# Altium PCB Micro2440.PcbDoc (part 2 of 2)
Units mil, origin at the board's own origin, x right, y up, seen from the top; angles counter-clockwise.
Board outline 3914 x 3499.3 mil, 2 copper layers (Top Layer, Bottom Layer); 61 components, 196 nets, 504 pads, 76 vias.
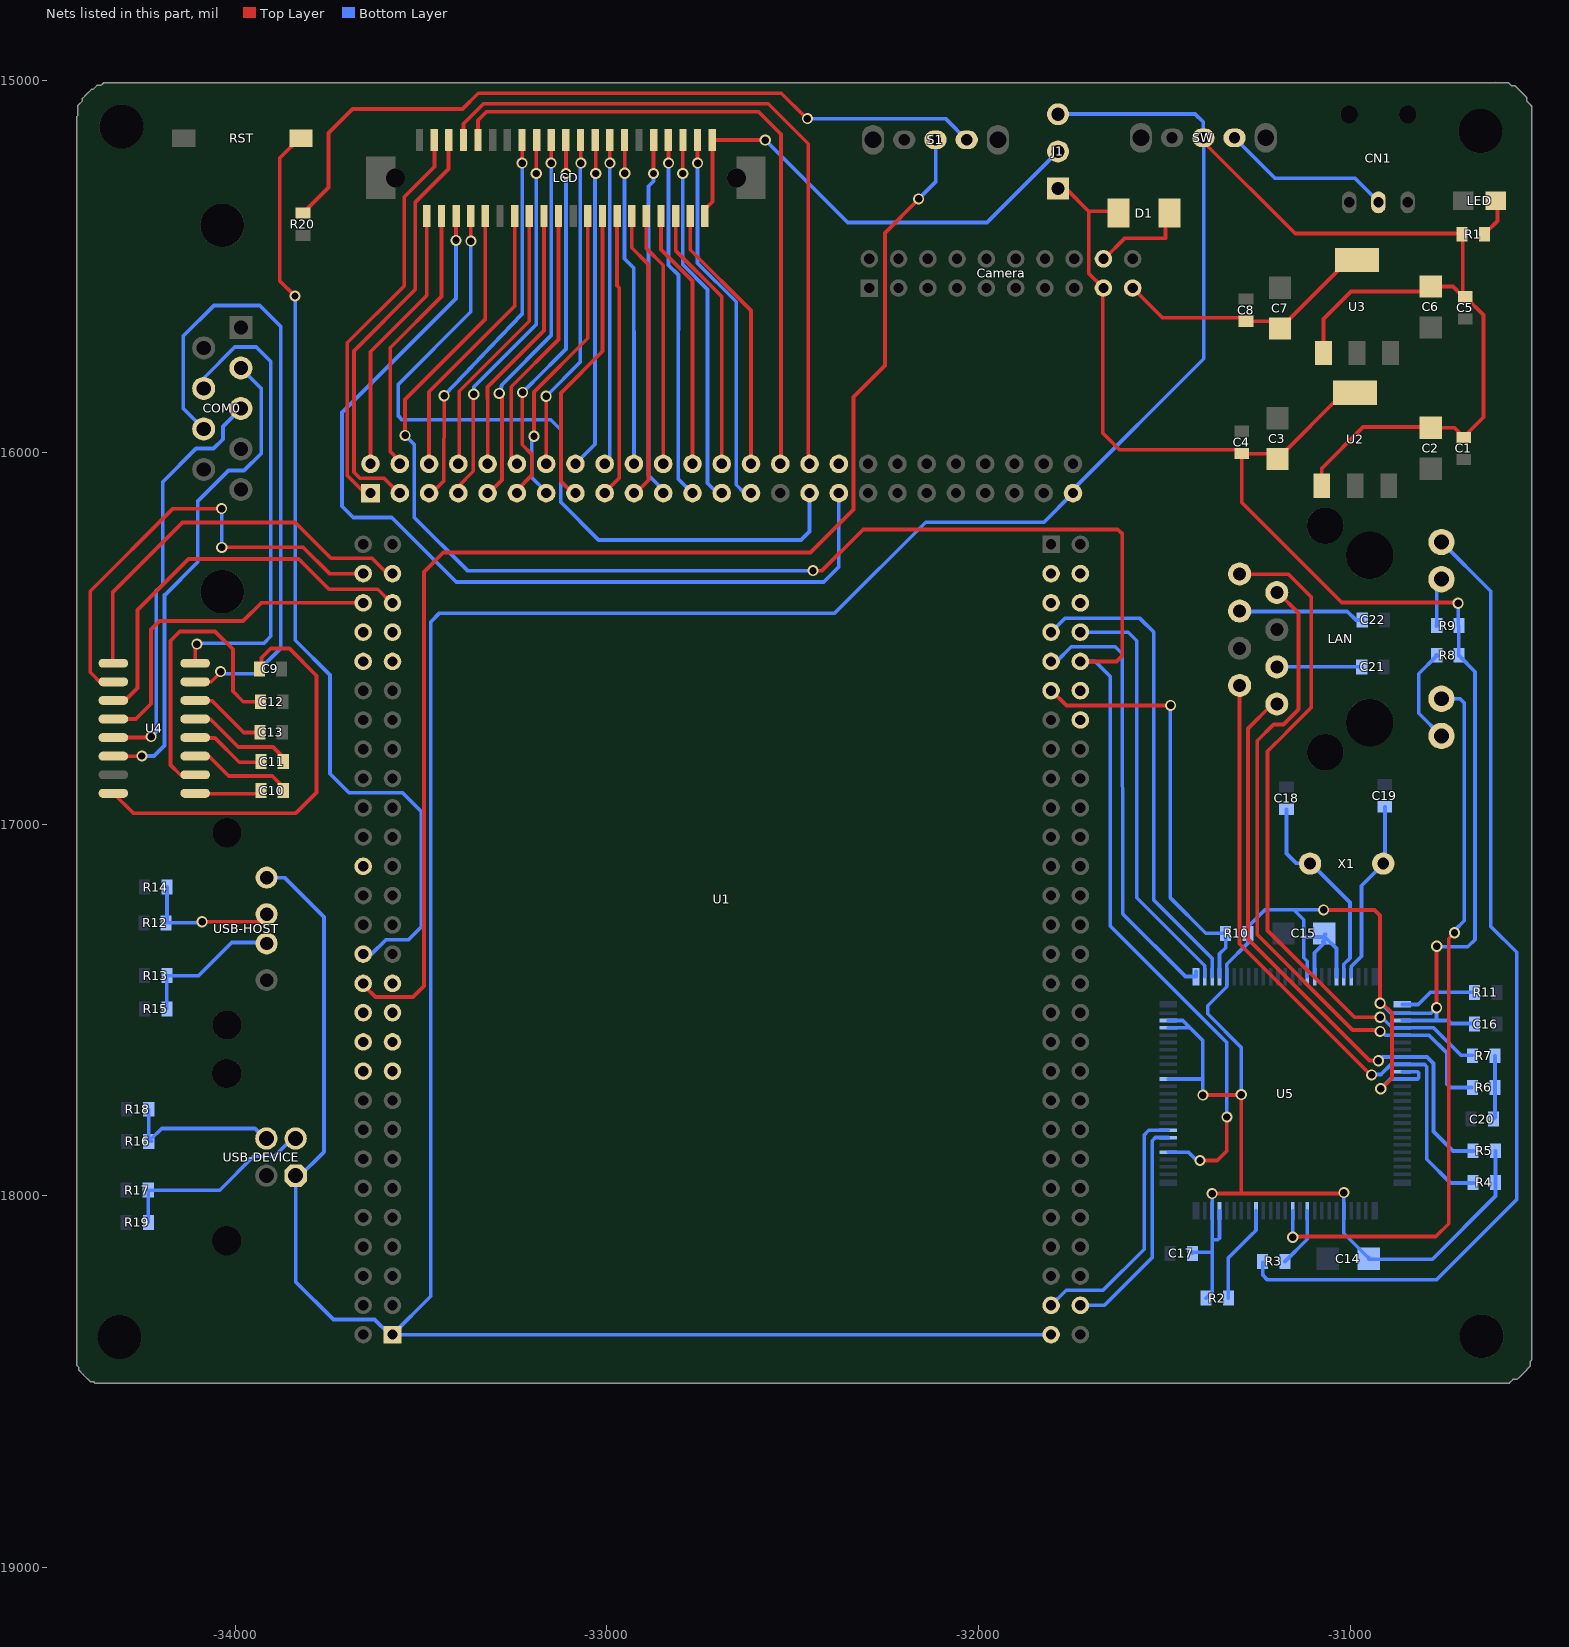
[diagram p2: the nets of this part, all layers, seen from the top]

## Via types
v1: diameter 30, hole 20, Top Layer to Bottom Layer, 75 vias
v2: diameter 30, hole 20, Top Layer to Bottom Layer, tented top, 1 vias

## Nets (pads, with @x,y where several pads share a name; then routed paths per layer and width w, separated by ;. In a path a pad name is that pad's centre, name@x,y a point inside that pad or via, vN(x,y) a via of type N, cw(c..) or ccw(c..) an arc to the next point about the centre after c; other vN are vias at no path point) (continued)
LDATA14: U1.PC53 U5.83 | length 690.5
  Bottom Layer w10: U1.PC53@-31805.13,-18294.87 -31764.51,-18254.24 -31665.07,-18254.24 -31554.69,-18143.85 -31554.69,-17836.42 -31542.12,-17823.86 U5.83@-31489.87,-17823.86
LDATA15: U1.PC54 U5.82 | length 607.4
  Bottom Layer w10: U1.PC54@-31726.39,-18294.87 -31661.68,-18294.87 -31533.08,-18166.26 -31533.08,-17852.21 -31524.41,-17843.54 U5.82@-31489.87,-17843.54
LEND: U1.PB34
LNGCS1: U1.PC3
LNGCS2: U1.PC5
LNGCS3: U1.PC4
LNGCS4: U1.PC7 U5.3 | length 1298.6
  Bottom Layer w10: U1.PC7@-31805.13,-16483.84 -31768.11,-16446.82 -31566.03,-16446.82 -31529.07,-16483.77 -31529.07,-16493.32 -31529.12,-17168.46 -31529.12,-17204.69 -31371.76,-17362.05 U5.3@-31371.76,-17410.47
LNOE: U1.PC9 U5.1 | length 1196.2
  Bottom Layer w10: U1.PC9@-31805.13,-16562.58 -31790.16,-16562.58 -31750.81,-16523.24 -31632.2,-16523.24 -31613.44,-16542 -31613.44,-16560.89 -31612.32,-17241.7 -31443.55,-17410.47 U5.1@-31415.06,-17410.47 U5.1@-31415.06,-17396.94
LNWBE1: U1.PC6
LNWE: U1.PC8 U5.2 | length 1140.9
  Bottom Layer w10: U1.PC8@-31726.39,-16483.84 -31597.49,-16483.84 -31574.45,-16506.88 -31574.45,-16509.06 -31574.38,-17182.39 -31574.38,-17198.34 -31391.44,-17381.28 U5.2@-31391.44,-17410.47
M_NRESET: RST.1 U1.PA28 | length 2589.4
  Top Layer w10: v1(-33839.13,-15579.5) -33880.4,-15538.23 -33880.4,-15208.79 -33823.2,-15151.59 RST.1@-33823.2,-15160.13
  Bottom Layer w10: v1@-33838.78,-15575.77 -33838.23,-15576.31 -33838.23,-16505.61 -33744.71,-16599.13 -33744.71,-16864.7 -33693.73,-16915.68 -33549.97,-16915.68 -33499.52,-16966.13 -33499.52,-17277 -33533.59,-17311.07 -33594.28,-17311.07 -33633.19,-17349.98 U1.PA28@-33655.53,-17349.98
NCTS0: U1.PA53 U4.9 | length 1085.4
  Top Layer w10: U4.9@-34327.69,-16567.44 -34329,-16566.13 -34329,-16376 -34141.97,-16188.97 -33838.12,-16188.97 -33741.85,-16285.24 -33632.17,-16285.24 -33591.04,-16326.36 U1.PA53@-33576.79,-16326.36 U1.PA53@-33576.79,-16319.49
NETACT: LAN.10 U5.62 | length 1991.1
  Top Layer w10: v1@-31156.35,-18109.93 -30769.96,-18109.93 -30735.34,-18075.31 -30735.34,-17308.52 v1@-30719.9,-17293.08
  Bottom Layer w10: U5.62@-31155.22,-18040.39 -31155.22,-18111.48 v1(-31155.03,-18111.67) ; LAN.10@-30754.84,-16663.02 -30704.77,-16663.02 -30693.48,-16674.31 -30693.48,-17260.36 -30718.16,-17285.04 v1@-30718.16,-17293.79
  other v1: -30719.81,-17292.55
NetC10_1: C10.1 U4.3 | length 290.7
  Top Layer w10: U4.3@-34123.69,-16818.44 -34107.69,-16818.44 -34069.56,-16818.44 -34017,-16871 -33900,-16871 C10.1@-33868,-16903
NetC10_2: C10.2 U4.1 | length 193.1
  Top Layer w10: U4.1@-34123.69,-16918.44 -34107.69,-16918.44 -33935.44,-16918.44 C10.2@-33932,-16915
NetC11_1: C11.1 U4.5 | length 294.8
  Top Layer w10: U4.5@-34123.69,-16718.44 -34107.69,-16718.44 -34066.56,-16718.44 -33992,-16793 -33898,-16793 C11.1@-33871,-16820
NetC11_2: C11.2 U4.4 | length 218.8
  Top Layer w10: U4.4@-34123.69,-16768.44 -34107.69,-16768.44 -34054.56,-16768.44 -33989,-16834 C11.2@-33932,-16834
NetC12_2: C12.2 U4.2 | length 808.6
  Top Layer w10: U4.2@-34107.69,-16867.44 -34147.56,-16867.44 -34174,-16841 -34174,-16507 -34149,-16482 -34054,-16482 -34006,-16530 -34006,-16643 -33978,-16671 ; -33978.21,-16671.21 C12.2@-33931.74,-16671.21
NetC13_2: C13.2 U4.6 | length 225.1
  Top Layer w10: U4.6@-34123.69,-16668.44 -34107.69,-16668.44 -34062.56,-16668.44 -33977,-16754 C13.2@-33934,-16754
NetC18_1: C18.1 U5.21 X1.1 | length 550.6
  Bottom Layer w10: C18.1@-31171.58,-16960.26 -31171.58,-17079.57 -31145.94,-17105.21 -31106.79,-17105.21 -31000.78,-17211.22 -31000.78,-17360.81 -31017.46,-17377.49 U5.21@-31017.46,-17410.29
NetC19_1: C19.1 U5.22 X1.2 | length 494.8
  Bottom Layer w10: U5.22@-30997.74,-17410.47 -30997.74,-17383.23 -30970.22,-17355.71 -30970.22,-17166.22 -30906.79,-17102.79 -30906.79,-16954.28 C19.1@-30907.42,-16953.65
NetC20_1: C20.1 R6.1 R7.1 | length 169.8
  Bottom Layer w10: C20.1@-30613.78,-17792.09 -30611.01,-17789.33 R6.1@-30611.01,-17708.68 R7.1@-30611.01,-17623.48
NetC21_1: C21.1 LAN.3 | length 229.9
  Bottom Layer w10: LAN.3@-31197.76,-16577.2 -30968.43,-16577.2 C21.1@-30968.03,-16577.59
NetC22_1: C22.1 LAN.6 | length 340.3
  Bottom Layer w10: LAN.6@-31298,-16428 -31008,-16428 -30984.6,-16451.4 C22.1@-30967.38,-16451.4
NetCN1_2: CN1.2 SW.2 | length 480.8
  Top Layer w10: CN1.2@-30936.09,-15343.93 -30924.48,-15332.33 CN1.2@-30924.48,-15327.53
  Bottom Layer w10: SW.2@-31311.36,-15153.89 -31202.48,-15262.76 -30987.44,-15262.76 CN1.2@-30923.37,-15326.83
NetLAN_9: LAN.9 R8.1 | length 262
  Bottom Layer w10: R8.1@-30769.24,-16546.76 R8.1@-30768,-16545.53 ; R8.1@-30768,-16548 -30816,-16596 -30816,-16701.87 LAN.9@-30754.84,-16763.02
NetLAN_11: LAN.11 R9.1 | length 132.9
  Bottom Layer w10: R9.1@-30768,-16468 -30766.74,-16466.74 -30767.67,-16465.8 -30767.67,-16354.2 LAN.11@-30754.84,-16341.37
NetLED_1: LED.1 R1.1 | length 96.1
  Top Layer w10: R1.1@-30639.47,-15413.42 -30604,-15377.95 LED.1@-30604,-15332
NETLINK: LAN.12 R3.1 | length 2670
  Bottom Layer w10: R3.1@-31235.61,-18179.73 -31235.92,-18180.05 -31235.92,-18212.18 -31235.22,-18212.89 ; -31234.93,-18213.95 -31222.52,-18226.36 -30768.79,-18226.36 -30588.89,-18046.46 ; LAN.12@-30756,-16242 LAN.12@-30755.74,-16242.26 ; LAN.12@-30756,-16240 -30621.96,-16374.04 -30621.96,-17275.58 -30552.46,-17345.08 -30552.46,-17365.13 ; -30589.49,-18047 -30552.36,-18009.88 -30552.36,-17361.5
NetR2_1: R2.1 U5.67 | length 266.5
  Bottom Layer w10: R2.1@-31328.1,-18275.59 -31328.1,-18166.74 -31263.46,-18102.1 -31262.73,-18102.1 -31253.65,-18093.01 U5.67@-31253.65,-18040.39
NetR3_2: R3.2 U5.60 | length 168.1
  Bottom Layer w10: R3.2@-31175.92,-18176.81 -31115.89,-18116.77 -31115.89,-18094.17 ; -31115.86,-18101.46 U5.60@-31115.86,-18040.9
NetR11_2: R11.2 U5.26 | length 210.7
  Bottom Layer w10: U5.26@-30859.94,-17485.28 -30817.04,-17485.28 -30784.62,-17452.85 R11.2@-30662.67,-17452.85
NetR12_1: R12.1 R14.1 USB-HOST.2 | length 374.4
  Top Layer w10: v1(-34088.87,-17262.79) -33936.07,-17262.79 USB-HOST.2@-33917.08,-17243.79
  Bottom Layer w10: R12.1@-34185.63,-17265.97 -34093.5,-17265.97 v1@-34088.88,-17261.34 ; R14.1@-34183.47,-17169.58 -34183.47,-17263.53 R12.1@-34182,-17265
NetR13_1: R13.1 R15.1 USB-HOST.3 | length 398.9
  Bottom Layer w10: R15.1@-34183.69,-17497.31 -34183.69,-17411.83 -34185.55,-17409.97 R13.1@-34183.52,-17407.94 ; R13.1@-34183.69,-17407.94 R13.1@-34183.52,-17407.94 ; R13.1@-34182.63,-17407.05 R13.1@-34183.52,-17407.94 ; USB-HOST.3@-33914.07,-17318.51 -34009.43,-17318.51 -34098.87,-17407.94 R13.1@-34183.52,-17407.94
NetR16_2: R16.2 R18.2 USB-DEVICE.3 | length 450.1
  Bottom Layer w10: R18.2@-34232.54,-17767.36 -34232.54,-17845.46 R16.2@-34228.39,-17849.61 ; USB-DEVICE.3@-33924.76,-17853.76 -33916.55,-17845.55 USB-DEVICE.3@-33916,-17845 ; USB-DEVICE.3@-33919,-17847 -33947,-17819 -34197.78,-17819 R16.2@-34228.39,-17849.61 ; R16.2@-34228.39,-17849.61 R16.2@-34232.54,-17853.76 -34224.24,-17853.76 R16.2@-34228.39,-17849.61
NetR17_2: R17.2 R19.1 USB-DEVICE.2 | length 533.2
  Bottom Layer w10: R19.1@-34233.95,-18070.42 -34233.63,-18070.1 R17.2@-34233.63,-17985.03 -34041.53,-17985.03 -33950.5,-17894 -33894,-17894 -33845,-17845 USB-DEVICE.2@-33844,-17845
NetR20_1: R20.1 S1.4 | length 2055.5
  Top Layer w10: R20.1@-33817.71,-15356.6 -33748.91,-15287.8 -33748.91,-15141.34 -33684.03,-15076.46 -33388.48,-15076.46 -33345.83,-15033.81 -32530.76,-15033.81 v1@-32464.46,-15100.12
  Bottom Layer w10: v1(-32460.54,-15102.37) -32089.07,-15102.37 S1.4@-32029.82,-15161.61
NRESET: LCD.10 U1.PC10 U5.80 | length 5061.1
  Top Layer w10: v1(-33542.84,-15954.71) -33543.31,-15857.81 -33326.87,-15641.37 LCD.10@-33326.87,-15364.16 ; v1(-32445.51,-16318.33) -32421.42,-16318.33 -32310.52,-16207.42 -31625.47,-16207.42 -31613.26,-16219.62 -31613.26,-16546.57 -31629.27,-16562.58 U1.PC10@-31726.39,-16562.58 U1.PC10@-31726.39,-16569.6 ; v2(-31404.42,-17905.16) -31357.96,-17905.16 -31332.24,-17879.44 v1(-31332.24,-17788.1)
  Bottom Layer w10: v1(-33542.84,-15954.71) -33518.28,-15979.26 -33518.28,-16175.26 -33375.22,-16318.33 v1(-32445.51,-16318.33) ; U1.PC10@-31726.39,-16562.58 -31686.15,-16562.58 -31646.21,-16602.52 -31646.21,-17273.63 -31332.24,-17587.6 v1(-31332.24,-17788.1) ; U5.80@-31489.87,-17882.91 -31435.12,-17882.91 -31412.88,-17905.16 v2(-31404.42,-17905.16)
NRTS0: U1.PA54 U4.10 | length 1226.9
  Top Layer w10: U4.10@-34358,-16624 -34390,-16592 -34390,-16374 -34168.23,-16152.23 v1@-34037.23,-16152.23 ; v1(-34036.21,-16255.78) -33817.15,-16255.78 -33746.56,-16326.36 U1.PA54@-33655.53,-16326.36
  Bottom Layer w10: v1(-34036.21,-16255.78) v1@-34036.21,-16151.65 ; U1.PA54@-33655.53,-16326.36 U1.PA54@-33650.52,-16326.36
  other v1: -34036.43,-16151.43
NWAIT: R10.2 U1.PC11 U5.4 | length 1167.5
  Top Layer w10: U1.PC11@-31805.13,-16641.32 -31803.66,-16641.32 -31763.92,-16681.06 v1(-31483.46,-16681.06)
  Bottom Layer w10: v1(-31483.46,-16681.06) -31484.13,-16681.73 -31484.13,-17198.71 -31388.76,-17294.08 R10.2@-31335.37,-17294.08 -31335.37,-17332.56 -31351.71,-17348.91 -31351.71,-17373.43 ; U5.4@-31352.07,-17410.47 U5.4@-31352.07,-17410 ; U5.4@-31352,-17410 -31352,-17373.43
NXDACK0: U1.PC12
NXDREQ0: U1.PC14
OM0: S1.3 U1.PA26 | length 3631.4
  Top Layer w10: U1.PA26@-33649.86,-17428.72 -33649.86,-17438.42 -33622.84,-17465.44 -33521.57,-17465.44 -33492.11,-17435.98 -33492.11,-16321.8 -33440.13,-16269.82 -32452.44,-16269.82 -32336.76,-16154.14 -32336.76,-15851.12 -32252,-15766.36 -32252,-15664.07 ; -32251.95,-15664.02 -32251.95,-15409.98 v1@-32160.9,-15318.92
  Bottom Layer w10: U1.PA26@-33655.53,-17428.72 U1.PA26@-33640.24,-17428.72 ; v1(-32161.49,-15318.32) -32114.98,-15271.81 S1.3@-32114.98,-15159.29
RSCTS0: COM0.7 U4.8 | length 1246
  Top Layer w10: U4.8@-34107.69,-16567.44 -34107.69,-16529.69 v1@-34106,-16528
  Bottom Layer w10: v1@-34104,-16514 -33922.87,-16514 -33904,-16495.13 -33904,-15756 -33943,-15717 -34001,-15717 -34084.63,-15800.63 COM0.7@-34084.63,-15828.16
  other v1: -34103,-16516
RSRTS0: COM0.8 U4.7 | length 1769.6
  Top Layer w10: U4.7@-34123.69,-16618.44 U4.7@-34082.44,-16618.44 ; U4.7@-34107.69,-16617.44 -34064.44,-16617.44 v1@-34039,-16592
  Bottom Layer w10: COM0.8@-34084.63,-15937.16 -34140,-15881.79 -34140,-15688 -34057,-15605 -33934,-15605 -33877,-15662 -33877,-16526.11 -33946.89,-16596 v1@-34040,-16596
  other v1: -34039,-16590
RSRXD0: COM0.3 U4.13 | length 1108.4
  Top Layer w10: U4.13@-34327.69,-16767.44 -34229.44,-16767.44 v1@-34229,-16767
  Bottom Layer w10: v1(-34226,-16765) -34212,-16751 -34212,-16371 ; -34210,-16371 -34195,-16356 -34195,-16080 -34105,-15990 -34058,-15990 -34033,-15965 -34033,-15930.53 COM0.3@-33984.63,-15882.16
RSTXD0: COM0.2 U4.14 | length 1306.4
  Top Layer w10: U4.14@-34327.69,-16817.44 -34266.56,-16817.44 -34266,-16818
  Bottom Layer w10: v1(-34251,-16817) -34218,-16817 -34190,-16789 -34190,-16388 ; -34190,-16384 -34189,-16384 -34101,-16296 -34101,-16132 -34018,-16049 -33976,-16049 -33930,-16003 -33930,-15828 -33984.73,-15773.27 COM0.2@-33988,-15770
RX+: LAN.8 R7.2 U5.29 | length 1854.3
  Top Layer w10: LAN.8@-31298,-16328 -31166,-16328 -31105.01,-16388.99 -31105.01,-16686.46 -31172.47,-16753.92 ; -31172.67,-16754.29 -31222.56,-16804.19 -31222.56,-17286.46 -30989.03,-17520 v1(-30920,-17520)
  Bottom Layer w10: v1(-30920,-17520) -30915.45,-17520 -30887.19,-17548.27 U5.29@-30859.94,-17548.27 ; U5.29@-30859.94,-17548 -30775.94,-17548 -30701.53,-17622.41 R7.2@-30671.47,-17622.41
RX-: LAN.7 R6.2 U5.30 | length 1802
  Top Layer w10: LAN.7@-31194,-16378 -31139.62,-16432.38 -31139.62,-16691.62 -31180,-16732 -31206.36,-16732 -31250.36,-16776 -31250.36,-17297.44 -30993.8,-17554 v1@-30920,-17554
  Bottom Layer w10: v1@-30922,-17554 -30920,-17554 -30906,-17568 -30788,-17568 -30740.15,-17615.85 -30740.15,-17699.85 -30731.05,-17708.95 R6.2@-30673.25,-17708.95
  other v1: -30920,-17558
RXD0: U1.PA52 U4.12 | length 918.8
  Top Layer w10: U4.12@-34327.69,-16717.44 -34267.3,-16717.44 -34226.57,-16676.71 -34226.57,-16476.61 -34203.83,-16453.87 -33978.71,-16453.87 -33929.94,-16405.1 U1.PA52@-33655.53,-16405.1
RXD1: U1.PA50
RXD2: U1.PA48 | length 19
  Bottom Layer w10: U1.PA48@-33674.55,-16562.58 U1.PA48@-33655.53,-16562.58
SDCLK: U1.PA20
SDCMD: U1.PA21
SDDATA0: U1.PA24
SDDATA1: U1.PA25
SDDATA2: U1.PA22
SDDATA3: U1.PA23
TSXM: LCD.5 U1.PB3 | length 1145.9
  Top Layer w10: U1.PB3@-33557.1,-16109.83 -33557.1,-16109.1 -33560.33,-16109.1 -33599.67,-16069.76 -33664.23,-16069.76 -33680.31,-16053.69 -33680.31,-15727.43 -33515.86,-15562.97 -33515.86,-15327.86 -33426,-15238 LCD.5@-33426,-15160
TSXP: LCD.4 U1.PB4 | length 734.4
  Top Layer w10: U1.PB4@-33557.1,-16031.09 -33557.1,-16023.32 -33582.53,-15997.89 -33582.53,-15718.77 -33444.98,-15581.23 LCD.4@-33444.98,-15364.16
TSYM: LCD.3 U1.PB1 | length 1081.7
  Top Layer w10: U1.PB1@-33635.84,-16109.83 -33651.11,-16109.83 -33698.31,-16062.62 -33698.31,-15705.19 -33545.4,-15552.28 -33545.4,-15313.29 -33464,-15231.9 LCD.3@-33464,-15160
TSYP: LCD.2 U1.PB2 | length 729.7
  Top Layer w10: U1.PB2@-33635.84,-16031.09 -33635.84,-15729.31 -33484.35,-15577.82 LCD.2@-33484.35,-15364.16
TX+: LAN.1 R5.1 U5.33 | length 1632.7
  Top Layer w10: LAN.1@-31198,-16678 -31210,-16678 -31275.24,-16743.24 -31275.24,-17309.31 -30948.54,-17636 v1@-30920,-17636
  Bottom Layer w10: v1(-30924.31,-17636.88) -30914.44,-17627.01 U5.33@-30859.94,-17627.01 -30793.39,-17627.01 -30776.15,-17644.25 -30776.15,-17827.28 -30723.76,-17879.67 R5.1@-30668.51,-17879.67
TX-: LAN.2 R4.1 U5.34 | length 1763.8
  Top Layer w10: LAN.2@-31298,-16630 -31298,-17322.23 -30949.1,-17671.13 -30938.87,-17671.13 v1@-30936,-17674
  Bottom Layer w10: v1@-30942.55,-17673.93 -30917.93,-17673.93 ; -30918,-17674 -30917.93,-17673.93 ; -30917.41,-17673.93 -30917.93,-17673.93 ; R4.1@-30668.57,-17965.88 -30730.16,-17965.88 -30794.17,-17901.87 -30794.17,-17653.07 -30800.55,-17646.69 U5.34@-30859.94,-17646.69 -30890.69,-17646.69 -30917.93,-17673.93
  other v1: -30942.77,-17675.03
TXD0: U1.PA51 U4.11 | length 1070.5
  Top Layer w10: U4.11@-34317,-16669 -34298,-16669 -34263,-16634 -34263,-16424 -34125.85,-16286.85 -33828.97,-16286.85 -33747.6,-16368.22 -33616.42,-16368.22 -33579.54,-16405.1 U1.PA51@-33576.79,-16405.1
TXD1: U1.PA49
TXD2: U1.PA47
VCC: C9.1 U4.16 | length 1114.5
  Top Layer w10: U4.16@-34327.69,-16917.44 -34274.45,-16970.68 -33836.68,-16970.68 -33781,-16915 -33781,-16600.92 -33853.92,-16528 -33904,-16528 -33929,-16553 C9.1@-33929,-16573
VCLK: LCD.6 U1.PB33 | length 2544.8
  Top Layer w10: v1(-33406,-15430) LCD.6@-33406,-15364
  Bottom Layer w10: v1(-33406,-15430) -33406,-15586 -33712.81,-15892.81 -33712.81,-16145.3 -33682.63,-16175.47 -33578.84,-16175.47 -33405.49,-16348.83 -32416.45,-16348.83 -32376,-16308.37 U1.PB33@-32376,-16109.83
VD0: LCD.39 U1.PB27 | length 1038
  Top Layer w10: v1(-32756,-15222) LCD.39@-32756.01,-15159.43 ; U1.PB27@-32630.1,-16109.83 U1.PB27@-32612.22,-16109.83
  Bottom Layer w10: v1(-32756,-15222) -32756,-15491.17 -32652.17,-15595 -32652.26,-15837.1 -32652.26,-16087.04 -32629.47,-16109.83 U1.PB27@-32612.22,-16109.83
VD1: LCD.38 U1.PB28 | length 734.6
  Top Layer w10: LCD.38@-32775.69,-15364.16 -32775.69,-15455.05 -32612.22,-15618.52 U1.PB28@-32612.22,-16031.09
VD2: LCD.37 U1.PB25 | length 1017
  Top Layer w10: v1(-32796,-15250) LCD.37@-32796,-15160 ; U1.PB25@-32708.05,-16109.83 U1.PB25@-32690.96,-16109.83
  Bottom Layer w10: v1(-32796,-15250) -32796,-15494.86 -32729.01,-15561.84 ; -32729.35,-15562.18 -32729.35,-16083.08 -32702.6,-16109.83 U1.PB25@-32690.96,-16109.83
VD3: LCD.36 U1.PB26 | length 717.1
  Top Layer w10: LCD.36@-32815.06,-15364.16 -32815.06,-15456.76 -32691.82,-15580 ; U1.PB26@-32690.96,-16031.09 -32690.96,-15580.86
VD4: LCD.35 U1.PB23 | length 999.7
  Top Layer w10: v1(-32834,-15222) LCD.35@-32834,-15158 ; U1.PB23@-32775.4,-16109.83 U1.PB23@-32769.7,-16109.83
  Bottom Layer w10: v1(-32834,-15222) -32834,-15496.63 -32807.53,-15523.1 -32807.83,-15820.54 ; -32807.84,-15835.96 -32807.83,-15820.57 ; U1.PB23@-32769.7,-16109.83 -32807.83,-16071.7 -32807.83,-15820.54
VD5: LCD.34 U1.PB24 | length 701.9
  Top Layer w10: LCD.34@-32854.43,-15364.16 -32854.43,-15454.2 -32769.57,-15539.07 ; U1.PB24@-32769.7,-16031.09 -32769.7,-15539.19
VD6: LCD.33 U1.PB21 | length 976.3
  Top Layer w10: v1(-32874.53,-15250) LCD.33@-32874.53,-15158
  Bottom Layer w10: v1(-32874.53,-15250) -32874.53,-15270.53 -32888.05,-15284.05 -32888.05,-16061.51 -32848.44,-16101.11 U1.PB21@-32848.44,-16109.83 U1.PB21@-32850.93,-16109.83
VD7: LCD.32 U1.PB22 | length 685.9
  Top Layer w10: LCD.32@-32893.8,-15364.16 -32893.8,-15451.41 -32848.27,-15496.94 -32848.44,-15497.11 U1.PB22@-32848.44,-16031.09
VD8: LCD.30 U1.PB19 | length 783.5
  Top Layer w10: LCD.30@-32933.17,-15364.16 -32933.17,-15449.47 -32893.35,-15489.29 -32887.94,-15494.7 -32887.94,-16075.38 -32922.39,-16109.83 U1.PB19@-32927.18,-16109.83
VD9: LCD.29 U1.PB20 | length 878.7
  Top Layer w10: v1(-32951.75,-15249.15) LCD.29@-32951.75,-15163.15
  Bottom Layer w10: v1(-32951.75,-15249.15) -32952.89,-15253.11 -32952.89,-15479.08 -32927.37,-15504.6 -32927.18,-15838.7 U1.PB20@-32927.18,-16031.09
VD10: LCD.28 U1.PB17 | length 764.5
  Top Layer w10: U1.PB17@-33005.92,-16109.83 -33005.92,-16108.38 -32966.55,-16069.01 -32966.55,-15557.62 -32972.54,-15551.63 LCD.28@-32972.54,-15364.16
VD11: LCD.27 U1.PB18 | length 878.9
  Top Layer w10: v1(-32992,-15222) LCD.27@-32992,-15158
  Bottom Layer w10: U1.PB18@-33005.92,-16031.09 -32992,-16017.17 v1(-32992,-15222)
VD12: LCD.26 U1.PB15 | length 810.6
  Top Layer w10: -33123.42,-15839.94 -33123.42,-16078.25 -33091.84,-16109.83 U1.PB15@-33084.66,-16109.83 ; -33122.34,-15838.86 -33011.91,-15728.44 LCD.26@-33011.91,-15364.16
VD13: LCD.25 U1.PB16 | length 876.9
  Top Layer w10: v1(-33030,-15250) LCD.25@-33030,-15162
  Bottom Layer w10: U1.PB16@-33084.66,-16031.09 -33032,-15978.42 v1@-33032,-15264
VD14: LCD.24 U1.PB13 | length 824.5
  Top Layer w10: v1(-33196.09,-15957) -33196.09,-15838.11 -33051.28,-15693.3 LCD.24@-33051.28,-15364.16
  Bottom Layer w10: v1(-33196.09,-15957) -33202.48,-15963.39 -33202.48,-16067.26 -33163.4,-16106.33 U1.PB13@-33163.4,-16109.83
VD15: LCD.23 U1.PB14 | length 904.9
  Top Layer w10: U1.PB14@-33163.4,-16031.09 v1(-33163.4,-15849.4) ; v1(-33070,-15222) LCD.23@-33070,-15162
  Bottom Layer w10: v1(-33163.4,-15849.4) -33072,-15758 v1@-33072,-15224
VD16: LCD.21 U1.PB11 | length 1022.6
  Top Layer w10: U1.PB11@-33242.14,-16109.83 -33242.14,-16101.81 -33202.48,-16062.15 -33202.48,-16004.62 -33227.62,-15979.49 v1@-33227.62,-15842.08 ; v1(-33110,-15250) LCD.21@-33110,-15160
  Bottom Layer w10: v1(-33226.83,-15838.83) -33200.29,-15812.28 -33200.07,-15812.16 ; -33200.61,-15812.71 -33110,-15722.09 v1(-33110,-15250)
VD17: LCD.20 U1.PB12 | length 725.8
  Top Layer w10: U1.PB12@-33242.14,-16031.09 -33257.19,-16016.03 -33257.19,-15823.69 -33130.02,-15696.52 LCD.20@-33130.02,-15364.16
VD18: LCD.19 U1.PB9 | length 1033.2
  Top Layer w10: U1.PB9@-33320.88,-16103.53 U1.PB9@-33320.88,-16109.83 -33317.29,-16109.83 -33282.01,-16074.55 -33282.01,-15849.04 v1(-33289.41,-15841.65) ; v1(-33150,-15222) LCD.19@-33150,-15160
  Bottom Layer w10: v1(-33289.41,-15841.65) -33282.12,-15818.12 -33150,-15686 v1(-33150,-15222)
VD19: LCD.18 U1.PB10 | length 729.8
  Top Layer w10: U1.PB10@-33320.88,-16031.09 -33320.88,-15855.12 -33321,-15855 -33321,-15824.23 -33169.39,-15672.62 LCD.18@-33169.39,-15364.16
VD20: LCD.17 U1.PB7 | length 1036.1
  Top Layer w10: U1.PB7@-33399.62,-16109.83 -33399.62,-16091.64 -33359.23,-16051.25 v1@-33359.23,-15843.88 ; v1(-33190,-15250) LCD.17@-33190,-15160
  Bottom Layer w10: v1(-33358.11,-15843.88) -33358,-15824 -33190,-15656 v1(-33190,-15250)
VD21: LCD.16 U1.PB8 | length 746
  Top Layer w10: U1.PB8@-33399.62,-16031.09 -33396.9,-16028.37 -33396.9,-15835.49 -33208.76,-15647.35 LCD.16@-33208.76,-15364.16
VD22: LCD.15 U1.PB5 | length 1065.1
  Top Layer w10: U1.PB5@-33478.36,-16109.83 -33471.62,-16109.83 -33438.97,-16077.18 v1(-33437.86,-15848.04) ; v1(-33228,-15222) LCD.15@-33228,-15160
  Bottom Layer w10: U1.PB5@-33478.36,-16109.83 U1.PB5@-33478.36,-16108.02 ; v1@-33438.97,-15838.97 v1(-33437.86,-15848.04) -33228,-15628 v1(-33228,-15222)
VD23: LCD.14 U1.PB6 | length 762.5
  Top Layer w10: U1.PB6@-33478.36,-16031.09 -33478.36,-15836.99 -33248,-15606.63 LCD.14@-33248,-15364
VDD5V: C1.1 C2.1 C5.1 C6.1 J1.3 R1.2 SW.3 U1.PA1 U1.PB49 U1.PC55 U2.3 U3.3 USB-DEVICE.1 USB-HOST.1 | length 11109.3
  Top Layer w10: SW.3@-31395.38,-15151.94 -31395.38,-15164.37 -31148.39,-15411.36 -30702.64,-15411.36 R1.2@-30700,-15414 ; U2.3@-31077,-16099 -31077,-16043.37 -30965.63,-15932 C2.1@-30784,-15932 ; U3.3@-31072,-15733 -31072,-15641.41 -30998.25,-15567.66 -30795.66,-15567.66 C6.1@-30784,-15556 ; C2.1@-30784,-15934 -30720,-15934 C1.1@-30694,-15960 ; C6.1@-30784,-15554 -30724,-15554 C5.1@-30702,-15576 ; C5.1@-30699.47,-15574.53 C5.1@-30692,-15582 ; R1.2@-30699.47,-15413.42 -30697.73,-15415.16 -30697.73,-15577.49 -30697.22,-15578 C5.1@-30682,-15578 ; C1.1@-30696,-15960 -30642,-15906 -30642,-15630.53 C5.1@-30690.79,-15581.74
  Bottom Layer w10: USB-HOST.1@-33915.38,-17144.22 -33866.78,-17144.22 -33861.6,-17149.4 ; -33864.47,-17146.35 -33761,-17249.82 -33761,-17882 USB-DEVICE.1@-33832,-17953 ; USB-DEVICE.1@-33837.35,-17946.02 -33837.35,-18231.28 -33735.8,-18332.83 -33625.01,-18332.83 -33584.23,-18373.61 U1.PC55@-31805.13,-18373.61 ; U1.PA1@-33576.79,-18373.61 -33473.81,-18270.62 -33473.81,-16456.34 -33450.14,-16432.68 -32387.14,-16432.68 -32142.34,-16187.89 -31824.14,-16187.89 U1.PB49@-31746.08,-16109.83 -31746.08,-16100.08 -31394.28,-15748.27 -31394.28,-15710.77 -31394.39,-15710.66 -31394.39,-15638.45 -31394.28,-15638.34 -31394.28,-15598.27 -31394.21,-15598.21 -31394.21,-15156.25 -31394.47,-15155.98 SW.3@-31394.47,-15154.43 ; J1.3@-31784.85,-15089.77 -31417.76,-15089.77 -31395.36,-15112.18 SW.3@-31395.36,-15153.89
VDD18V: C7.1 C8.1 Camera.19 U3.4 | length 678.1
  Top Layer w10: Camera.19@-31585.41,-15558.1 -31505.51,-15638 -31280.21,-15638 C8.1@-31280,-15638 ; C8.1@-31280.21,-15647.26 C7.1@-31193.74,-15647.26 ; C7.1@-31189,-15667 U3.4@-31010,-15488
VDD33V: C3.1 C4.1 C14.1 C15.1 C16.1 C17.1 Camera.17 D1.1 J1.1 R2.2 R4.2 R5.2 R8.2 R9.2 R10.1 U2.4 U5.5 U5.16 U5.17 U5.20 U5.27 U5.28 U5.35 U5.36 U5.55 U5.72 U5.73 U5.90 U5.97 U5.98 | length 8393.9
  Top Layer w10: J1.1@-31786.23,-15293.11 -31762.2,-15293.11 -31704,-15351.32 -31704,-15518.25 Camera.17@-31664.15,-15558.1 ; -31701.22,-15351.32 -31630.33,-15351.32 D1.1@-31629.74,-15350.72 ; Camera.17@-31666,-15558 -31666,-15948 -31620.74,-15993.26 -31292.21,-15993.26 -31292.21,-16135.15 -31023.36,-16404 v1@-30710,-16404 ; v1@-31396.22,-17729.24 v1@-31294.73,-17729.24 ; v1(-31371.76,-17994.24) -31021.89,-17994.24 v1@-31018.25,-17990.6 ; v1(-31293.32,-17727.84) -31293.32,-17993.68 -31292.76,-17994.24 ; C4.1@-31292,-16004 C3.1@-31212,-16004 ; C3.1@-31196,-16018 -31018,-15840 U2.4@-30987,-15840 ; v1(-31071.71,-17231.15) -30935.23,-17231.15 -30920,-17246.38 v1(-30920,-17482) -30914,-17482 -30888,-17508 -30888,-17684 v1@-30917,-17713 ; U2.4@-31020,-15842 U2.4@-30988,-15842 ; v1(-30768.04,-17494.07) v1@-30768.04,-17329.68
  Bottom Layer w10: U5.90@-31489.87,-17686.06 -31396.76,-17686.06 -31396.66,-17685.96 ; U5.97@-31489.87,-17548 -31432.87,-17548 ; U5.98@-31489.87,-17528.58 -31450.87,-17528.58 -31396.66,-17582.8 -31396.66,-17685.96 ; C17.1@-31425.04,-18155.07 -31421.66,-18151.68 -31371.76,-18151.68 ; v1(-31396.66,-17729.24) -31396.66,-17685.96 ; R2.2@-31388.1,-18275.59 -31371.76,-18259.24 v1(-31371.76,-17994.24) ; -31371.76,-18118.68 -31356.88,-18118.68 -31352.07,-18113.87 U5.72@-31352.07,-18040.39 ; v1(-31293.32,-17727.84) -31293.32,-17601.06 -31383.79,-17510.6 -31383.79,-17489.12 -31332.39,-17437.72 -31332.39,-17377.26 -31275.37,-17320.24 R10.1@-31275.37,-17294.08 ; R10.1@-31274.39,-17275.58 -31229.39,-17230.57 v1@-31072.28,-17230.57 ; -31152.47,-17230.57 -31125.32,-17257.72 -31125.32,-17359.66 -31115.85,-17369.13 U5.16@-31115.85,-17410.47 ; -31125.32,-17303.95 -31072.15,-17303.95 C15.1@-31070,-17301.8 ; U5.17@-31096.17,-17410.47 -31096.17,-17346.17 -31070,-17320 C15.1@-31070,-17301.8 ; C15.1@-31074,-17316 C15.1@-31069,-17321 ; C15.1@-31067.88,-17296.57 C15.1@-31066.53,-17296.57 ; U5.20@-31037.11,-17410.47 -31037.11,-17334.69 C15.1@-31070,-17301.8 ; v1(-31017.43,-17991.43) -31017.43,-18100.97 -30953.14,-18165.26 C14.1@-30950.9,-18165.26 ; C14.1@-30950.3,-18170.81 -30779.3,-18170.81 -30609.54,-18001.05 R5.2@-30609.54,-17879.12 ; v1@-30918,-17482 -30891.1,-17508.9 -30782.87,-17508.9 v1(-30768.04,-17494.07) -30768.04,-17526.47 -30769.33,-17527.77 ; v1@-30917.88,-17712 -30891.94,-17686.06 -30819.01,-17686.06 -30815.72,-17682.77 -30815.72,-17669.45 -30818.79,-17666.38 U5.35@-30859.94,-17666.38 ; U5.28@-30859.94,-17528.58 -30737.11,-17528.58 -30729,-17536.69 C16.1@-30665.67,-17536.69 ; v1@-30767.68,-17330.34 -30683.82,-17330.34 -30664.65,-17311.17 -30664.65,-16590.35 -30708,-16547 -30708,-16468 -30710,-16466 v1(-30710,-16406) ; v1@-30710,-16404 v1@-30707.53,-16406.47 ; C16.1@-30667.03,-17536.69 C16.1@-30665.67,-17538.04 ; R4.2@-30610.35,-17965.12 R4.2@-30609.54,-17964.31 ; R4.2@-30609.54,-17965.33 R4.2@-30608.98,-17965.9
  other v1: -30918,-17712 -30767.68,-17328.87
VDD_CAM: Camera.18 D1.2 | length 255.9
  Top Layer w10: Camera.18@-31664.15,-15479.36 -31661.89,-15479.36 -31606.33,-15423.81 -31497.03,-15423.81 D1.2@-31497.03,-15358.05
VDDLCD: J1.2 LCD.40 LCD.41 | length 1299.2
  Top Layer w10: LCD.40@-32736.32,-15346.32 -32716,-15326 -32716,-15160 v1(-32574,-15160)
  Bottom Layer w10: v1(-32574,-15160) -32352.17,-15381.83 -31977.45,-15381.83 J1.2@-31786.17,-15190.55 ; J1.2@-31787.41,-15193.52 J1.2@-31784.89,-15191
VDDRTC: U1.PA34
VFRAME: LCD.8 U1.PB31 | length 2091.1
  Top Layer w10: v1(-33366,-15432) LCD.8@-33366,-15364
  Bottom Layer w10: v1(-33366,-15432) -33366,-15622 -33560.92,-15816.92 -33560.92,-15902.57 -33552.57,-15910.92 -33552.57,-15912.2 -33151.18,-15912.2 -33124.17,-15939.21 -33124.17,-16134.02 -33022.22,-16235.96 -32477.76,-16235.96 -32454.74,-16212.94 U1.PB31@-32454.74,-16109.83
VLINE: LCD.7 U1.PB32 | length 1900.8
  Top Layer w10: LCD.7@-33385.93,-15159.43 -33385.93,-15115.93 -33332.19,-15062.19 -32565.81,-15062.19 -32458.15,-15169.84 -32458.15,-16027.67 U1.PB32@-32454.74,-16031.09
VM: LCD.9 U1.PB30 | length 1789.6
  Top Layer w10: LCD.9@-33346.56,-15159.43 -33346.56,-15106.56 -33324,-15084.01 -32591.99,-15084.01 -32531.69,-15144.31 -32531.69,-16029.29 U1.PB30@-32533.48,-16031.09
WP_SD: U1.PA19
pads on no net: CN1.A CN1.B COM0. COM0.1 COM0.4 COM0.6 COM0.9 LAN.C LAN.D LCD.1 LCD.A LCD.B LCD.C LCD.D S1.1 S1.2 S1.5 SW.1 SW.4 SW.5 U2.2 U3.2 U5.24 U5.37 U5.38 U5.39 U5.40 U5.41 U5.43 U5.44 U5.45 U5.46 U5.47 U5.49 U5.50 U5.51 U5.52 U5.53 U5.54 U5.56 U5.57 U5.59 U5.61 U5.64 U5.65 U5.66 U5.68 U5.69 U5.70 U5.71 U5.74 U5.75 U5.77 U5.78 U5.79 U5.91 USB-DEVICE.5 USB-DEVICE.6 USB-HOST.5 USB-HOST.6
copper on no net: | length 14.5
  Top Layer w10: -30561.86,-19070 -30552.2,-19070 ; -30542.54,-19070 -30537.71,-19070

## Polygon pours and split planes (outlines as drawn)
GND on Top Layer "Bottom Layer-No Net" (solid, pour order 14): -34324,-15005 -30576,-15005 -30574.47,-15006.53 -30566.96,-15006.53 -30557.57,-15015.92 -30547.96,-15015.92 -30540.93,-15022.95 -30521.92,-15041.96 -30521.92,-15045.48 -30514.65,-15052.75 -30514.65,-15071.74 -30514.65,-15084.88 -30511.83,-15087.69 -30513.01,-15088.87 -30513.01,-18441.62 -30513.01,-18447.72 -30520.05,-18454.76 -30520.05,-18460.86 -30529.43,-18470.24 -30555.23,-18496.04 -30560.39,-18496.04 -30568.6,-18504.25 -30589.71,-18504.25 -30638.97,-18504.25 -30639.44,-18504.72 -30639.66,-18504.94 -30726.68,-18504.94 -30727.11,-18505.37 -34366.02,-18505.37 -34370.78,-18500.62 -34384.17,-18500.62 -34390.15,-18500.62 -34404.78,-18485.98 -34418.36,-18472.4 -34418.36,-18470.48 -34418.36,-18460.97 -34426.29,-18453.03 -34426.82,-18452.51 -34426.82,-18425.01 -34426.82,-15086.18 -34424.09,-15083.45 -34424.09,-15069.29 -34416.51,-15061.71 -34416.51,-15054.48 -34403.67,-15041.64 -34391.37,-15029.34 -34391.37,-15028.7 -34376.17,-15013.51 -34367.22,-15013.51 -34359.63,-15005.91 -34344.98,-15005.91 -34324.91,-15005.91 -34324,-15005
GND on Bottom Layer "Bottom Layer-No Net" (solid, pour order 16): -34312.81,-15005.55 -30573.64,-15005.55 -30570.73,-15008.46 -30561.11,-15008.46 -30555.27,-15014.29 -30549.09,-15014.29 -30532.61,-15030.78 -30517.84,-15045.55 -30517.84,-15050.35 -30517.84,-15064.09 -30513.72,-15068.21 -30509.6,-15072.33 -30509.6,-15119.38 -30509.6,-18422.62 -30513.01,-18426.03 -30515.15,-18428.17 -30515.15,-18446.94 -30515.15,-18454.19 -30525.17,-18464.21 -30539.67,-18478.7 -30539.67,-18485.31 -30546.28,-18485.31 -30559.08,-18498.11 -30561.21,-18500.24 -30575.28,-18500.24 -30584.88,-18500.24 -30590,-18505.36 -30590.21,-18505.58 -30620.28,-18505.58 -34371.67,-18505.58 -34378.07,-18499.18 -34391.5,-18499.18 -34403.02,-18487.66 -34416.03,-18474.65 -34416.03,-18468.68 -34424.98,-18459.73 -34424.98,-18450.78 -34424.98,-18424.97 -34427.32,-18422.63 -34427.32,-18352.69 -34427.32,-15097.35 -34426,-15096.02 -34426,-15073 -34418.71,-15065.72 -34418.71,-15055.65 -34402.4,-15039.34 -34400.76,-15039.34 -34388.4,-15026.97 -34375.28,-15013.85 -34371.12,-15013.85 -34363.67,-15006.4 -34344.52,-15006.4 -34325.4,-15006.4 -34324,-15005

## Keep-outs
Keep-Out Layer:
  lines w10: -34426,-15577 -34426,-18436.3 ccw(c-34357.46,-18435.77) -34356.93,-18504.3 ; -34426,-15575 -34426,-15096.02 ; -34426,-15097 cw(c-34326,-15105) -34318,-15005 ; -34357.46,-18504.31 -34300.05,-18504.31 ; -34324,-15005 -34283.25,-15005 -34217.75,-15005 -30598.58,-15005 ; -34307.66,-18504.31 -30598.21,-18504.31 ; -34183,-15005 -30602.16,-15005 ; -30600.88,-15005.02 -30590.48,-15005.3 cw(c-30592.68,-15085.96) -30512.02,-15088.16 ; -30598.23,-18504.32 ccw(c-30595.93,-18420.44) -30512.05,-18422.74 ; -30512,-18420.44 -30512,-18361 -30512,-15085.96 ; -30601,-15005 -30600.98,-15005

## Silkscreen, mask and mechanical layers (free items; w line width, h text height)
Top Overlay:
  text "Nand" at -31998.97,-15058.49 h30
  text "Nor" at -32348.39,-15061.52 h30
  text "EMBEDE_LAB" at -33483,-16181 h30
  text "ARM920T" at -32848.54,-17308.27 h60
Bottom Overlay:
  text "+" at -31000.78,-17313.23 h30
  text "+" at -30870.88,-18161.3 h30

## Text inside footprints (layer, text, board x,y; h text height)
LAN: Top Overlay "7" at -31096.69,-16344.74 h50 r90; Top Overlay "1" at -31083.63,-16725.03 h50 r90
LCD: Top Overlay "1" at -33537.5,-15134.83 h23.62 r180; Top Overlay "2" at -33527.66,-15359.24 h23.62 r180; Top Overlay "41" at -32631.99,-15137.78 h23.62 r180; Top Overlay "40" at -32631.01,-15357.27 h23.62 r180